# Altium PCB IRarray-v6.1.pcbdoc
Units mm, origin at the board's own origin, x right, y up, seen from the top; angles counter-clockwise.
Board outline 81.01 x 98.47 mm, 2 copper layers (Top Layer, Bottom Layer); 65 components, 52 nets, 132 pads, 0 vias.
Unrouted connection lines stored in the file: 22.
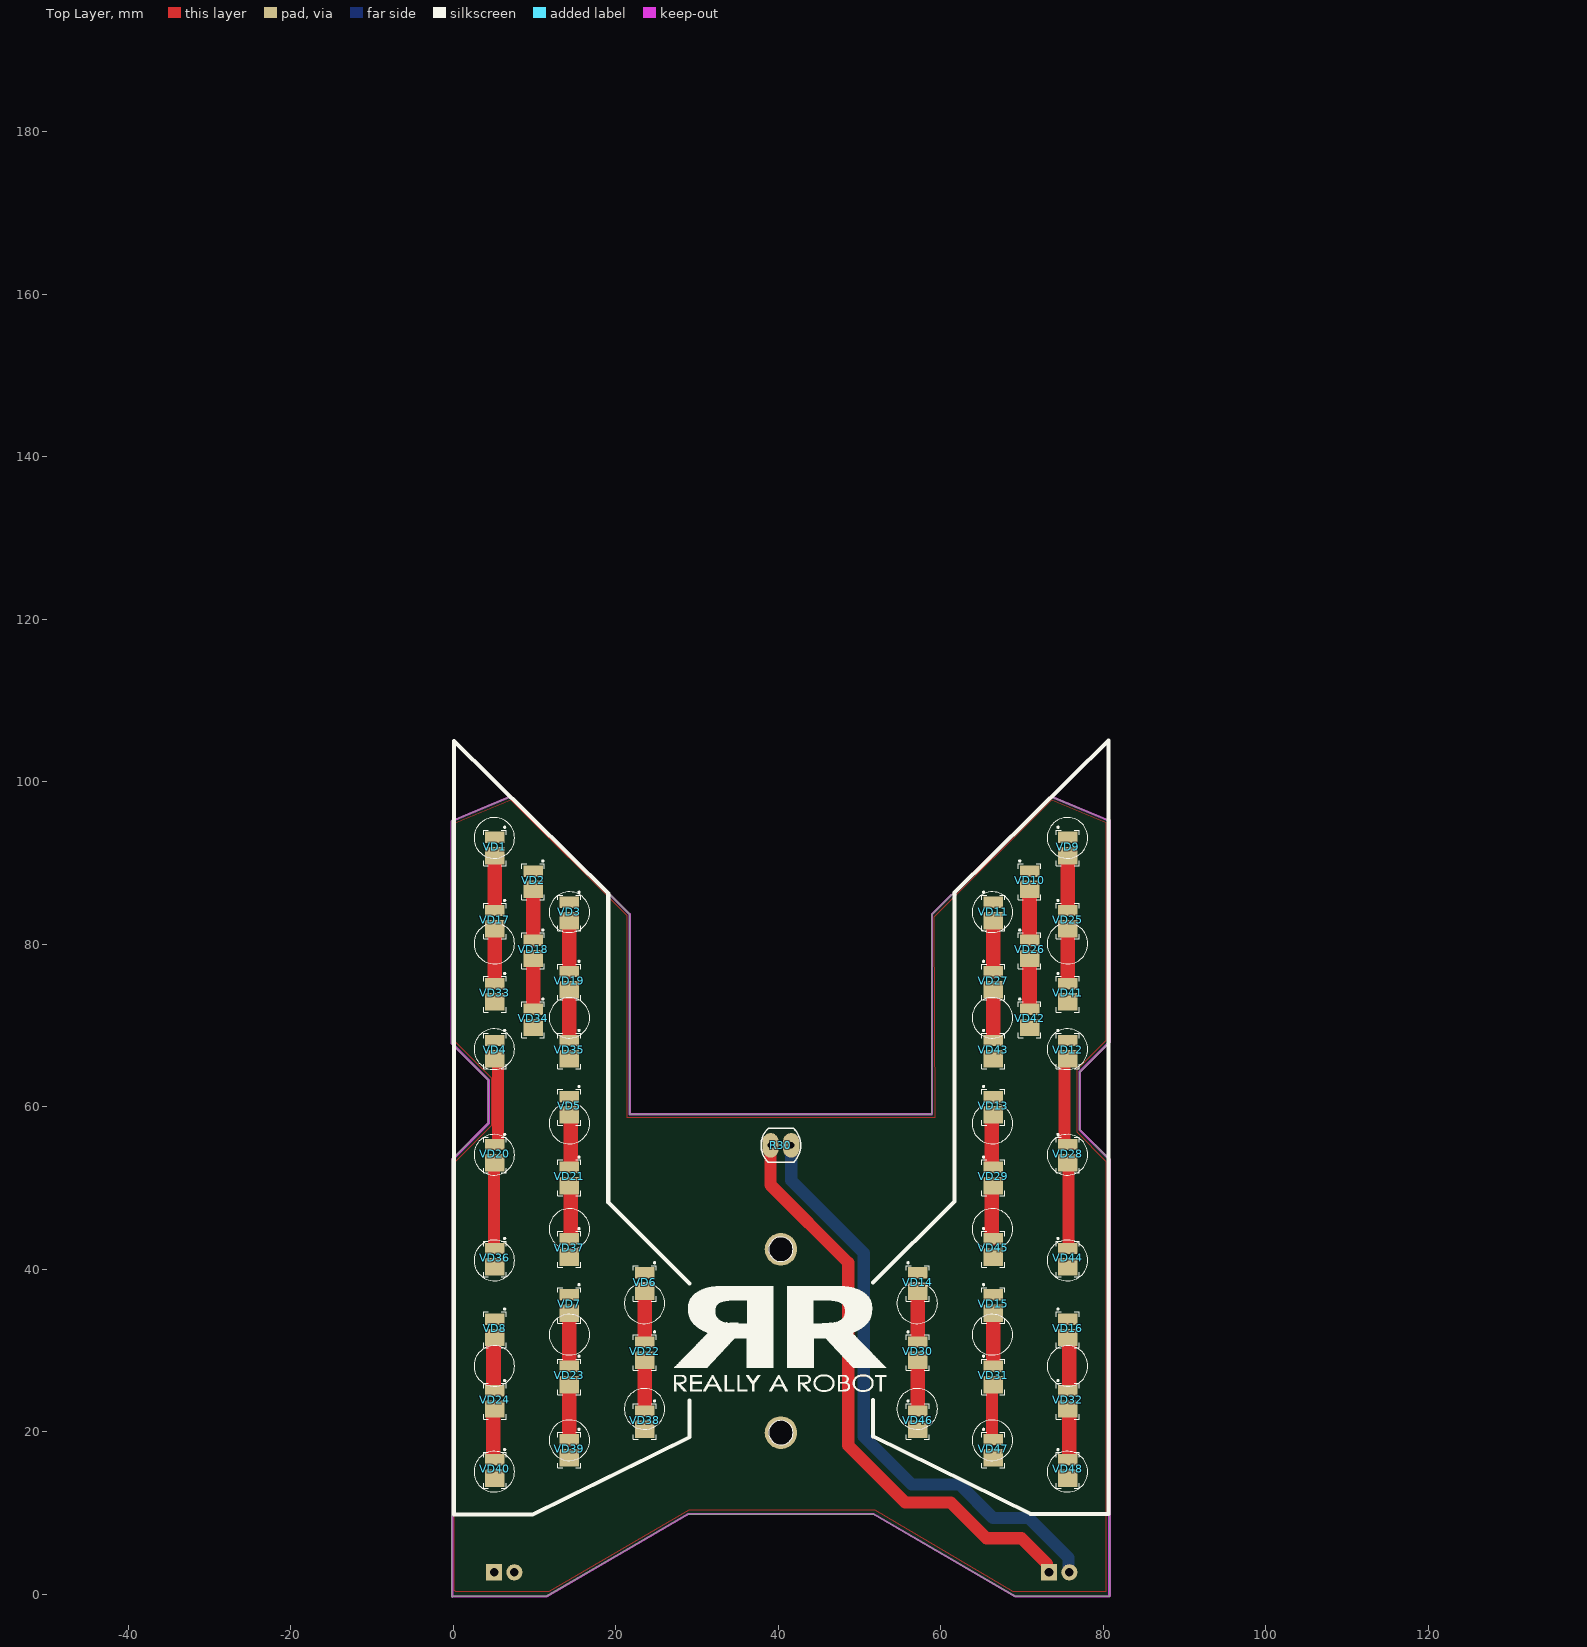
[diagram p0: Top Layer view]
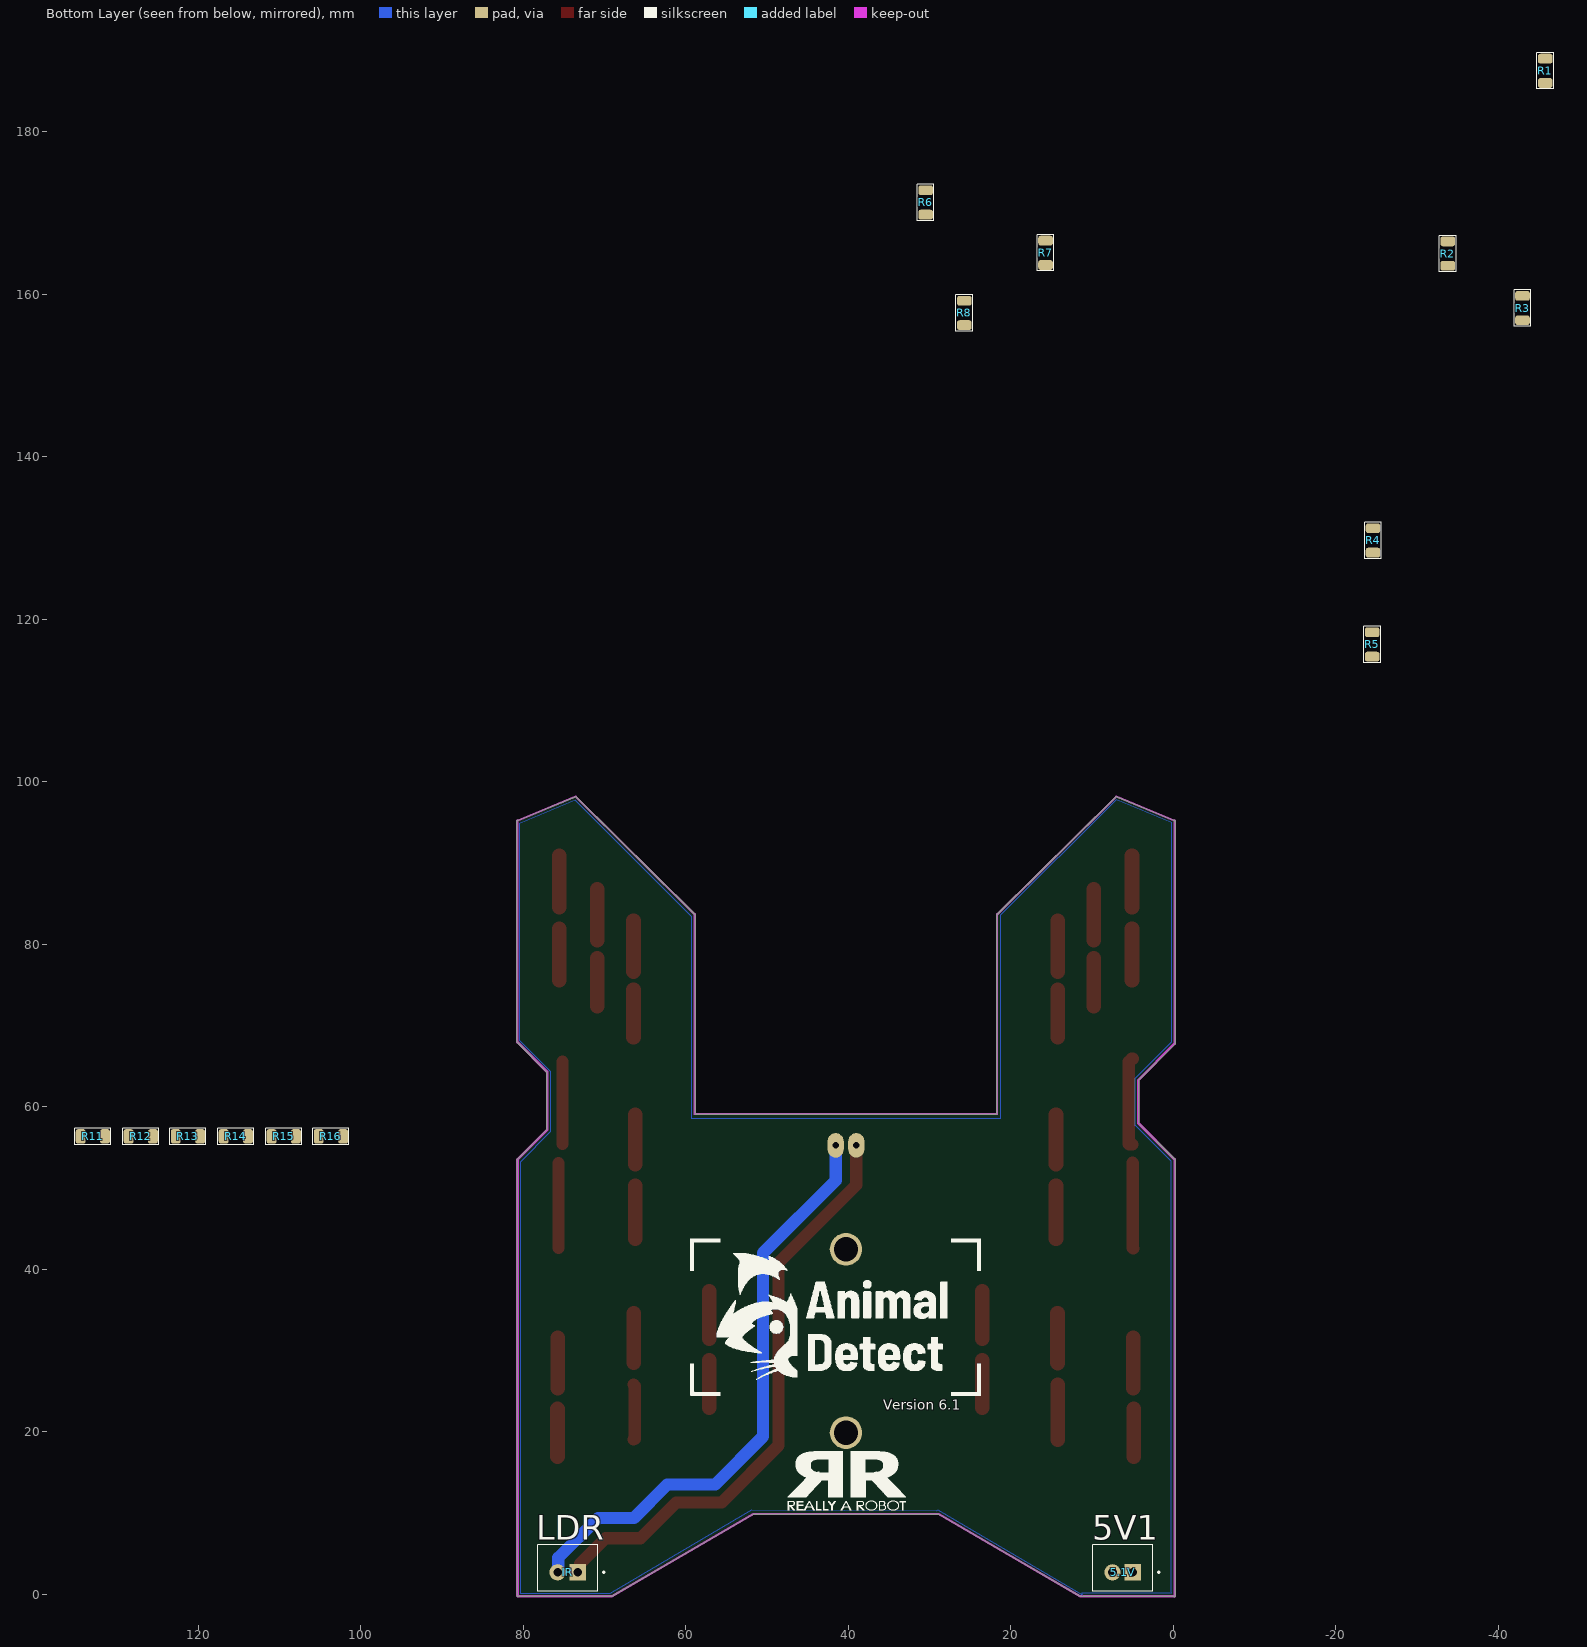
[diagram p1: Bottom Layer view, seen from below]

## Layer stack, top to bottom
Top Solder: solder mask 0.0102, Solder Resist, Dk 3.5
Top Layer: signal copper 0.0356
Dielectric1: dielectric 0.32, FR-4, Dk 4.8
Bottom Layer: signal copper 0.0356
Bottom Solder: solder mask 0.0102, Solder Resist, Dk 3.5

## Board outline
-0.2,-0.2 ccw(c-0.1,-0.2) -0.023,-0.264 11.437,-0.271 11.473,-0.261 28.891,9.871 51.709,9.871 69.127,-0.261 69.163,-0.271 80.628,-0.271 ccw(c80.676,-0.182) 80.776,-0.182 80.776,53.476 80.747,53.547 77.1,57.193 77.1,64.258 80.771,67.929 80.8,68 80.8,95.141 ccw(c80.7,95.141) 80.657,95.232 73.616,98.172 73.538,98.157 58.904,83.692 58.883,83.642 58.883,59.087 21.717,59.087 21.717,83.642 21.696,83.692 7.062,98.157 6.984,98.172 -0.065,95.228 ccw(c-0.107,95.137) -0.207,95.137 -0.207,67.807 -0.178,67.736 4.3,63.258 4.3,58.017 -0.171,53.547 -0.2,53.476

## Design rules (kind name [scope] priority, off if disabled: settings)
Clearance [All] p1: gap=0.25 ignorepadtopadclearanceinfootprint=TRUE
ComponentClearance [All] p1: gap=0.25 collisioncheckmode=3 verticalgap=0.01 showdistances=FALSE
DiffPairsRouting [All] p1: maxlimit=2.54 minlimit=0.127 mostfreqgap=0.254 toplayer_minwidth=0.508 toplayer_maxwidth=2.54 toplayer_prefwidth=0.508 bottomlayer_minwidth=0.508 bottomlayer_maxwidth=2.54 bottomlayer_prefwidth=0.508 maxuncoupledlength=12.7
HoleSize [All] p1: absolutevalues=TRUE maxlimit=4 minlimit=0.3 maxpercent=80.000 minpercent=20.000
MinimumSolderMaskSliver [All] p1: minsoldermaskwidth=0.075
PlaneConnect [All] p1: planeconnectstyle=Relief reliefexpansion=0.254 reliefentries=4 reliefconductorwidth=1.524 reliefairgap=0.508
PolygonConnect [All] p1: connectstyle=Relief reliefconductorwidth=1.524 reliefentries=4 polygonreliefangle="90 Angle" airgapwidth=0.3
RoutingVias [All] p1: holewidth=0.711 width=1.27 viastyle="Through Hole" minholewidth=0.711 minwidth=1.27 maxholewidth=0.711 maxwidth=1.27
SilkToSilkClearance [All] p1: silktosilkclearance=0.1
SilkToSolderMaskClearance [IsPad] p1: minsilkscreentomaskgap=0.1 clearancetoexposedcopper=TRUE
SolderMaskExpansion [All] p1: expansion=0.1 istentingtop=FALSE
Width Width_PWR [All] p1: maxlimit=5 minlimit=0.3 preferedwidth=0.5
23 further rules are at their usual default settings.

## Classes and differential pairs
component class V6-IRarray: 5.1V IR R1 R2 R3 R4 R5 R6 R7 R8 R11 R12 R13 R14 R15 R16 R30 VD1 VD2 VD3 VD4 VD5 VD6 VD7 VD8 VD17 VD18 VD19 VD20 VD21 VD22 VD23 VD24 VD33 VD34 VD35 VD36 VD37 VD38 VD39 VD40

## Components (designator, comment, footprint, x,y, rotation, side; value= is the part's Value field where it differs from the comment)
5.1V "B2B-XH-A(LF)(SN)" JST_B2B-XH-A(LF)(SN) 6.25,3.225 r180 bottom
IR "B2B-XH-A(LF)(SN)" JST_B2B-XH-A(LF)(SN) 74.55,3.225 r180 bottom
R1 "21 5% 1/4W" R1206 -45.762,187.5 r90 bottom
R2 "21 5% 1/4W" R1206 -33.762,165 r90 bottom
R3 "21 5% 1/4W" R1206 -42.962,158.3 r270 bottom
R4 "21 5% 1/4W" R1206 -24.562,129.7 r90 bottom
R5 "21 5% 1/4W" R1206 -24.462,116.9 r90 bottom
R6 "21 5% 1/4W" R1206 30.5,171.3 r90 bottom
R7 "21 5% 1/4W" R1206 15.738,165.1 r90 bottom
R8 "21 5% 1/4W" R1206 25.738,157.7 r270 bottom
R11 "21 5% 1/4W" R1206 133,56.352 r180 bottom
R12 "21 5% 1/4W" R1206 127.1,56.352 r180 bottom
R13 "21 5% 1/4W" R1206 121.3,56.352 r180 bottom
R14 "21 5% 1/4W" R1206 115.4,56.352 r180 bottom
R15 "21 5% 1/4W" R1206 109.5,56.352 r180 bottom
R16 "21 5% 1/4W" R1206 103.7,56.352 r180 bottom
R30 "VT90N1" EXCE-VT90N1 40.3,55.252 r0 top
VD1 "LED3030??????????" LED_2835#1 5.15,92.2 r270 top
VD2 "LED3030??????????" LED_2835#1 9.85,88.05 r270 top
VD3 "LED3030??????????" LED_2835#1 14.3,84.2 r270 top
VD4 "LED3030??????????" LED_2835#1 5.15,67.2 r270 top
VD5 "LED3030??????????" LED_2835#1 14.3,60.3 r270 top
VD6 "LED3030??????????" LED_2835#1 23.6,38.6 r270 top
VD7 "LED3030??????????" LED_2835#1 14.3,35.9 r270 top
VD8 "LED3030??????????" LED_2835#1 5.15,32.9 r270 top
VD9 "LED3030??????????" LED_2835#2 75.55,92.2 r270 top (schematic designator VD1)
VD10 "LED3030??????????" LED_2835#2 70.85,88.05 r270 top (schematic designator VD2)
VD11 "LED3030??????????" LED_2835#2 66.4,84.2 r270 top (schematic designator VD3)
VD12 "LED3030??????????" LED_2835#2 75.55,67.2 r270 top (schematic designator VD4)
VD13 "LED3030??????????" LED_2835#2 66.4,60.3 r270 top (schematic designator VD5)
VD14 "LED3030??????????" LED_2835#2 57.1,38.6 r270 top (schematic designator VD6)
VD15 "LED3030??????????" LED_2835#2 66.4,35.9 r270 top (schematic designator VD7)
VD16 "LED3030??????????" LED_2835#2 75.55,32.9 r270 top (schematic designator VD8)
VD17 "LED3030??????????" LED_2835#1 5.15,83.2 r270 top
VD18 "LED3030??????????" LED_2835#1 9.85,79.55 r270 top
VD19 "LED3030??????????" LED_2835#1 14.3,75.7 r270 top
VD20 "LED3030??????????" LED_2835#1 5.15,54.4 r270 top
VD21 "LED3030??????????" LED_2835#1 14.3,51.6 r270 top
VD22 "LED3030??????????" LED_2835#1 23.6,30.1 r270 top
VD23 "LED3030??????????" LED_2835#1 14.3,27.1 r270 top
VD24 "LED3030??????????" LED_2835#1 5.15,24.1 r270 top
VD25 "LED3030??????????" LED_2835#2 75.55,83.2 r270 top (schematic designator VD17)
VD26 "LED3030??????????" LED_2835#2 70.85,79.55 r270 top (schematic designator VD18)
VD27 "LED3030??????????" LED_2835#2 66.4,75.7 r270 top (schematic designator VD19)
VD28 "LED3030??????????" LED_2835#2 75.55,54.4 r270 top (schematic designator VD20)
VD29 "LED3030??????????" LED_2835#2 66.4,51.6 r270 top (schematic designator VD21)
VD30 "LED3030??????????" LED_2835#2 57.1,30.1 r270 top (schematic designator VD22)
VD31 "LED3030??????????" LED_2835#2 66.4,27.1 r270 top (schematic designator VD23)
VD32 "LED3030??????????" LED_2835#2 75.55,24.1 r270 top (schematic designator VD24)
VD33 "LED3030??????????" LED_2835#1 5.15,74.2 r270 top
VD34 "LED3030??????????" LED_2835#1 9.85,71.05 r270 top
VD35 "LED3030??????????" LED_2835#1 14.3,67.2 r270 top
VD36 "LED3030??????????" LED_2835#1 5.15,41.6 r270 top
VD37 "LED3030??????????" LED_2835#1 14.3,42.8 r270 top
VD38 "LED3030??????????" LED_2835#1 23.6,21.6 r270 top
VD39 "LED3030??????????" LED_2835#1 14.3,18.1 r270 top
VD40 "LED3030??????????" LED_2835#1 5.15,15.6 r270 top
VD41 "LED3030??????????" LED_2835#2 75.55,74.2 r270 top (schematic designator VD33)
VD42 "LED3030??????????" LED_2835#2 70.85,71.05 r270 top (schematic designator VD34)
VD43 "LED3030??????????" LED_2835#2 66.4,67.2 r270 top (schematic designator VD35)
VD44 "LED3030??????????" LED_2835#2 75.55,41.6 r270 top (schematic designator VD36)
VD45 "LED3030??????????" LED_2835#2 66.4,42.8 r270 top (schematic designator VD37)
VD46 "LED3030??????????" LED_2835#2 57.1,21.6 r270 top (schematic designator VD38)
VD47 "LED3030??????????" LED_2835#2 66.4,18.1 r270 top (schematic designator VD39)
VD48 "LED3030??????????" LED_2835#2 75.55,15.6 r270 top (schematic designator VD40)

## Footprints (in the part's own frame and the unit in brackets; to place one, negate y for a bottom-side part, rotate by r counter-clockwise, add the part's x,y. Pads: shape width x height; smd on the part's side, far side on the other; paste and mask are expansions set on the pad)
EXCE-VT90N1 [mm] "THD, 2-Leads, Body Width 4.17mm (Max), Height 2.29mm"
  oval 2x3 hole 0.8: 1(-1.27,0) 2(1.27,0)
  silkscreen extent -2.44,-2.08 2.44,2.08, body extent -2.44,-2.09 2.44,2.09, height 2.29
JST_B2B-XH-A(LF)(SN) [mm]
  rect 2x2 hole 1.05: 1(1.25,-0.525)
  round 2 hole 1.05: 2(-1.25,-0.525)
  silkscreen extent -3.7,-2.88 4.54,2.88, body extent -3.7,-2.88 3.7,2.88, height 7
LED_2835#1 [mm]
  rect 1.4x2.4 smd paste-0.25: 1(-0.95,-0.05)
  rect 2.14x2.4 smd paste-0.25: 2(1.3,-0.05)
  silkscreen extent -2.3,-1.45 2.55,1.35, body extent -1.35,-1.75 2.05,1.65, height 2.2
LED_2835#2 [mm]
  rect 1.4x2.4 smd paste-0.25: 1(-0.95,0.05)
  rect 2.14x2.4 smd paste-0.25: 2(1.3,0.05)
  silkscreen extent -2.3,-1.35 2.55,1.45, body extent -1.35,-1.65 2.05,1.75, height 2.2
R1206 [mm]
  rrect50% 1.2x1.8 smd: 1(-1.5,0) 2(1.5,0)
  silkscreen extent -2.22,-1.02 2.22,1.02, body extent -1.6,-0.8 1.6,0.8, height 0.6

## Part data
5.1V IR: "Connector Header Through Hole 2 position 0.098 (2.50mm)", Package=None, Check_prices=https://www.snapeda.com/parts/B2B-XH-A(LF)(SN)/JST+Sales+America+Inc./view-part/?ref=eda, MF="JST Sales America Inc.", MP=B2B-XH-A(LF)(SN), SnapEDA_Link=https://www.snapeda.com/parts/B2B-XH-A(LF)(SN)/JST+Sales+America+Inc./view-part/?ref=snap
R1 R2 R3 R4 R5 R6 R7 R8 R11 R12 R13 R14 R15 R16: library part R-1206, "SMD 1206 0.25W 5% 200V", Type=RES
R30: library part CMP-2000-07406-1, "Photoconductive Resistor, 200 kOhm, 100 V, 80 mW, -40 to 75 degC, 2-Pin THD, RoHS", Dark Resistance=200kohm, Manufacturer="Excelitas Technology", Operating Temperature Max=75°C, Operating Temperature Min=-40°C, Package Description="2-Pin Through Hole Device, Body Width 4.17 mm (Max), Height 2.29 mm", Power Rating=80mW, Resistance @ Lux=12kohm, Resistor Case Style=-, Voltage Rating=100V, Datasheet URL=http://datasheet.octopart.com/VT90N1-Excelitas-datasheet-10388451.pdf, Datasheet Version=09/2006, Manufacturer URL=http://www.excelitas.com/Pages/Index.aspx, Mounting Technology=ThroughHole, Package Reference=VT90N1, Packaging=Each, Product Range=-, SVHC=Cadmiumchloride(15-Jun-2015)
VD1 VD2 VD3 VD4 VD5 VD6 VD7 VD8 VD9 VD10 VD11 VD12 VD13 VD14 VD15 VD16 VD17 VD18 VD19 VD20 VD21 VD22 VD23 VD24 VD25 VD26 VD27 VD28 VD29 VD30 VD31 VD32 VD33 VD34 VD35 VD36 VD37 VD38 VD39 VD40 VD41 VD42 VD43 VD44 VD45 VD46 VD47 VD48: library part "LED 2835"

## Free pads (board coordinates)
  round 4 hole 3: 50(40.3,42.456) 51(40.3,19.889)

## Nets (pads, with @x,y where several pads share a name; then routed paths per layer and width w, separated by ;. In a path a pad name is that pad's centre, name@x,y a point inside that pad or via, vN(x,y) a via of type N, cw(c..) or ccw(c..) an arc to the next point about the centre after c; other vN are vias at no path point)
5V: 5.1V.2 R1.1 R2.1 R3.1 R4.1 R5.1 R6.1 R7.1 R8.1 R11.1 R12.1 R13.1 R14.1 R15.1 R16.1
A1-LDR: IR.1 R30.1 | length 72.5
  Top Layer w1.5: R30.1 39.03,50.37 48.6,40.8 48.6,18.3 55.6,11.3 61.2,11.3 65.6,6.9 69.9,6.9 73.05,3.75 73.05,2.95 IR.1
GND: 5.1V.1 VD33.2 VD34.2 VD35.2 VD36.2 VD37.2 VD38.2 VD39.2 VD40.2
NetIR_2: IR.2 R30.2 | length 72.8
  Bottom Layer w1.5: R30.2 41.57,50.93 50.5,42 50.5,19.4 56.4,13.5 62.3,13.5 66.4,9.4 70.8,9.4 75.704,4.496 75.704,2.796 IR.2
NetR1_2: R1.2 VD1.1
NetR2_2: R2.2 VD2.1
NetR3_2: R3.2 VD3.1
NetR4_2: R4.2 VD4.1
NetR5_2: R5.2 VD5.1
NetR6_2: R6.2 VD6.1
NetR7_2: R7.2 VD7.1
NetR8_2: R8.2 VD8.1
NetR9_2: 
NetR10_2: 
NetR11_2: R11.2
NetR12_2: R12.2
NetR13_2: R13.2
NetR14_2: R14.2
NetR15_2: R15.2
NetR16_2: R16.2
NetVD1_2: VD1.2 VD17.1 | length 6.4
  Top Layer w1.8: VD17.1@5.1,84.55 VD1.2
NetVD2_2: VD2.2 VD18.1 | length 6.2
  Top Layer w1.8: VD18.1 VD2.2
NetVD3_2: VD3.2 VD19.1 | length 6.3
  Top Layer w1.8: VD19.1 VD3.2
NetVD4_2: VD4.2 VD20.1 | length 11.3
  Top Layer w1.5: VD4.2@5,65.9 5.13,65.9 5.5,65.53 5.5,55.4 5.45,55.35 VD20.1@5.05,55.35
NetVD5_2: VD5.2 VD21.1 | length 6.1
  Top Layer w1.8: VD21.1@14.45,52.95 VD5.2@14.45,59
NetVD6_2: VD6.2 VD22.1 | length 5.9
  Top Layer w1.8: VD22.1@23.55,31.45 VD6.2
NetVD7_2: VD7.2 VD23.1 | length 6.2
  Top Layer w1.8: VD23.1@14.25,28.45 14.275,28.475 14.275,34.575 VD7.2@14.3,34.6
NetVD8_2: VD8.2 VD24.1 | length 6.2
  Top Layer w1.8: VD24.1@4.925,25.35 VD8.2@4.925,31.575
NetVD9_2: 
NetVD10_2: 
NetVD11_2: 
NetVD12_2: 
NetVD13_2: 
NetVD14_2: 
NetVD15_2: 
NetVD16_2: 
NetVD17_2: VD17.2 VD33.1 | length 6.4
  Top Layer w1.8: VD33.1@5.1,75.55 VD17.2
NetVD18_2: VD18.2 VD34.1 | length 5.9
  Top Layer w1.8: VD34.1@9.8,72.4 VD18.2
NetVD19_2: VD19.2 VD35.1 | length 5.9
  Top Layer w1.8: VD35.1@14.25,68.55 VD19.2
NetVD20_2: VD20.2 VD36.1 | length 10.6
  Top Layer w1.5: VD36.1@4.95,42.55 5,42.6 5,53.05 VD20.2@5.05,53.1
NetVD21_2: VD21.2 VD37.1 | length 6.5
  Top Layer w1.8: VD37.1@14.45,43.75 VD21.2@14.45,50.3
NetVD22_2: VD22.2 VD38.1 | length 5.9
  Top Layer w1.8: VD38.1@23.55,22.95 VD22.2
NetVD23_2: VD23.2 VD39.1 | length 6.8
  Top Layer w1.8: VD39.1 VD23.2
NetVD24_2: VD24.2 VD40.1 | length 5.9
  Top Layer w1.8: VD40.1@4.9,16.95 VD24.2@4.9,22.8
NetVD25_2: 
NetVD26_2: 
NetVD27_2: 
NetVD28_2: 
NetVD29_2: 
NetVD30_2: 
NetVD31_2: 
NetVD32_2: 
pads on no net: VD9.1 VD9.2 VD10.1 VD10.2 VD11.1 VD11.2 VD12.1 VD12.2 VD13.1 VD13.2 VD14.1 VD14.2 VD15.1 VD15.2 VD16.1 VD16.2 VD25.1 VD25.2 VD26.1 VD26.2 VD27.1 VD27.2 VD28.1 VD28.2 VD29.1 VD29.2 VD30.1 VD30.2 VD31.1 VD31.2 VD32.1 VD32.2 VD41.1 VD41.2 VD42.1 VD42.2 VD43.1 VD43.2 VD44.1 VD44.2 VD45.1 VD45.2 VD46.1 VD46.2 VD47.1 VD47.2 VD48.1 VD48.2
copper on no net: | length 106.9
  Top Layer w1.5: 66.45,19.05 66.4,19.1 66.3,19.1 66.3,25.65 66.45,25.8 ; 75.2,55.4 75.2,65.53 ; 75.7,42.6 75.7,53.05
  Top Layer w1.8: 57.15,22.95 57.15,28.8 ; 57.15,31.45 57.15,37.3 ; 66.25,43.75 66.25,50.3 ; 66.25,52.95 66.25,59 ; 66.425,28.475 66.425,34.575 ; 66.45,68.55 66.45,74.4 ; 66.45,76.65 66.45,82.9 ; 70.9,72.4 70.9,78.25 ; 70.9,80.5 70.9,86.75 ; 75.6,75.55 75.6,81.9 ; 75.6,84.55 75.6,90.9 ; 75.775,25.35 75.775,31.575 ; 75.8,16.95 75.8,22.8

## Polygon pours and split planes (outlines as drawn)
GND on Top Layer "NONET_L-01_P-001" (solid, shelved, pour order 1): 0.1,0.5 0.1,53.1 4.7,57.7 4.7,63.5 0.2,68 0.286,94.777 0.286,95 0.225,94.939 7.062,97.8 21.3,83.562 21.3,58.7 59.27,58.7 59.206,83.39 73.616,97.8 80.3,95 80.3,68.148 76.7,64.548 76.7,56.9 80.3,53.3 80.3,0.314 68.877,0.314 51.932,10.35 28.972,10.35 11.738,0.314 0.286,0.314
5V on Bottom Layer "NONET_L-01_P-001" (solid, shelved, pour order 0): 0.2,0.2 0.3,0.3 0.3,53.3 4.7,57.7 4.7,63.5 0.2,68 0.2,94.8 0.2,94.963 7.062,97.8 21.3,83.562 21.3,83.2 21.3,58.5 59.3,58.5 59.3,83.4 73.616,97.716 80.5,94.8 80.5,94.7 80.5,68.2 76.7,64.4 76.7,56.9 80.4,53.2 80.4,0.1 69.3,0.1 51.917,10.4 29.1,10.3 29,10.4 11.2,-0.033 11.2,0.2

## Keep-outs
Keep-Out Layer:
  lines w0.127: -0.107,-0.2 11.437,-0.207 11.441,-0.206 28.873,9.935 51.727,9.935 69.159,-0.206 69.163,-0.207 80.7,-0.207 80.707,-0.2 ; -0.107,95.137 -0.102,95.143 7.009,98.113 7.017,98.112 21.652,83.647 21.654,83.642 21.654,59.023 58.946,59.023 58.946,83.642 58.948,83.647 73.583,98.112 ; 73.591,98.113 80.702,95.143 80.707,95.137
  lines w0.2: -0.107,95.137 -0.107,67.807 4.4,63.3 4.4,57.976 -0.1,53.476 -0.1,-0.2 ; 80.676,-0.182 80.676,53.476 77,57.151 77,64.3 80.7,68 80.7,95.141
  lines w0.254: 73.538,98.157 58.904,83.692 58.883,83.642 58.883,59.087 21.717,59.087 21.717,83.642 21.696,83.692 7.062,98.157 6.984,98.172 -0.065,95.228 ccw(c-0.107,95.137) -0.207,95.137 -0.207,67.807 -0.178,67.736 4.3,63.258 4.3,58.017 -0.171,53.547 -0.2,53.476 -0.2,-0.2 ccw(c-0.1,-0.2) -0.023,-0.264 11.437,-0.271 11.473,-0.261 28.891,9.871 51.709,9.871 69.127,-0.261 69.163,-0.271 80.628,-0.271 ccw(c80.676,-0.182) 80.776,-0.182 80.776,53.476 80.747,53.547 77.1,57.193 77.1,64.258 80.771,67.929 80.8,68 80.8,95.141 ccw(c80.7,95.141) 80.657,95.232 73.616,98.172

## Silkscreen, mask and mechanical layers (free items; w line width, h text height)
Top Overlay:
  drawing of 62 lines, arcs and shapes, not listed
Bottom Overlay:
  drawing of 34 lines, arcs and shapes, not listed
  text "Version 6.1" at 35.7,22.7 h1.2
  text "5V1" at 10,6.7 h3
  text "LDR" at 78.4,6.7 h3